# EAGLE board source_eagle (EAGLE 9.6.2)
REV: B
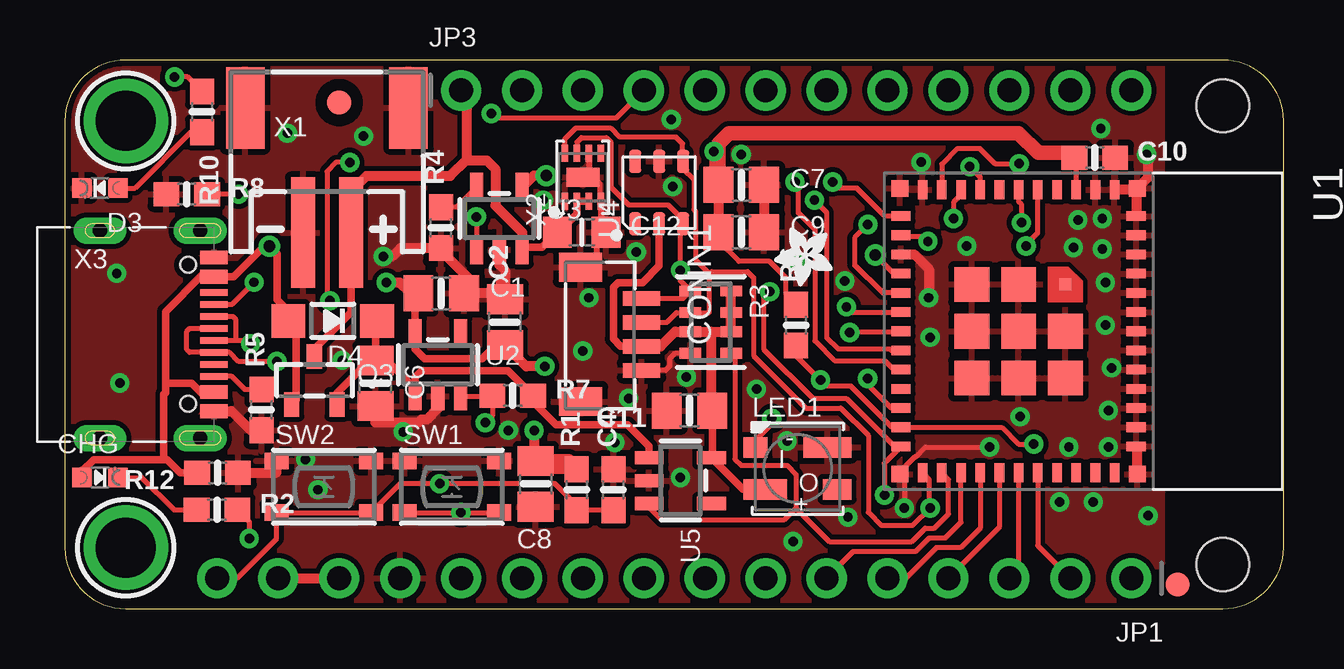
[diagram p0: board, top side]
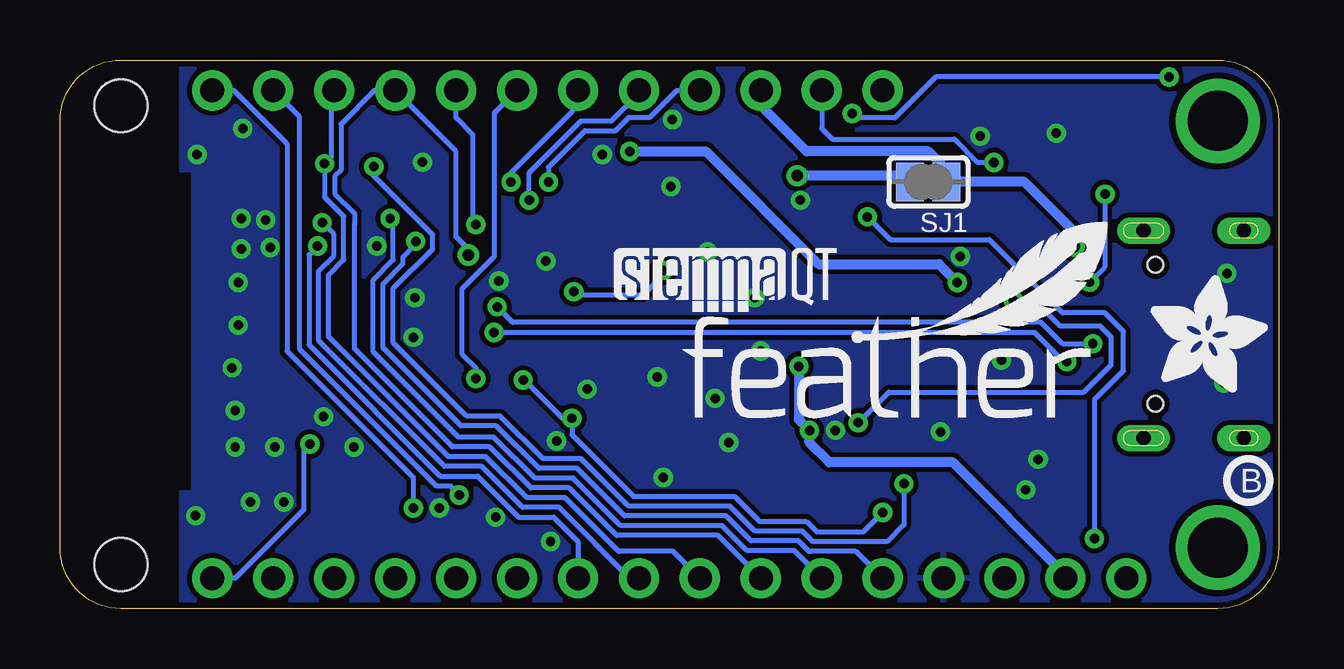
[diagram p1: board, bottom side, seen from below]

Size 50.8 x 22.86 mm. Coordinates in mm from the lower left corner, seen from the top.
Outline: 2.54,0 48.26,0 arc90 50.8,2.54 50.8,20.32 arc90 48.26,22.86 2.54,22.86 arc90 0,20.32 0,2.54 arc90 2.54,0
Copper layers (1*16): Top 0.035mm / dielectric 1.5mm / Bottom 0.035mm
Design rules "adafruit 7-7 *": minimum track width 6mil, minimum drill 15.5mil, track to track 8mil, track to pad 7mil, pad to pad 7mil, via to via 7mil, smd to smd 7mil, copper to edge 10mil, drill to drill 8mil, minimum pad ring 10mil, minimum via ring 8mil, stop-mask expansion 2mil, vias tented up to drill 20mil, thermal gap 10mil
Net classes: 2 gnd: width 0.254 mm, drill 0.483 mm; 3 Power: width 0.305 mm, drill 0.483 mm
Holes 2.2 mm at 48.26,1.84 48.26,20.95

## Footprints (pad centres in the part's own frame; a part is rotated, then mirrored left to right if it is on the bottom)
0805-NO = smd 1.24 x 1.5: 1 -0.95,0; 2 0.95,0
0603-NO = smd 1.075 x 1: 1 -0.85,0; 2 0.85,0
_0805MP = smd 1.2 x 1.3: 1 -1.016,0; 2 1.016,0
CHIPLED_0603_NOOUTLINE = smd 0.8 x 0.8: A 0,-0.75; C 0,0.75
JST_SH4_RA = smd 0.6 x 1.55: 1 1.5,0.924; 2 0.5,0.924; 3 -0.5,0.924; 4 -1.5,0.924 | smd 1.2 x 1.8: MT1 -2.8,-1.624; MT2 2.8,-1.624
SOD-123 = smd 1.4 x 1.4: A 1.85,0; C -1.85,0
1X16_ROUND = drill 1 pad 1.676: 1 -19.05,0; 2 -16.51,0; 3 -13.97,0; 4 -11.43,0; 5 -8.89,0; 6 -6.35,0; 7 -3.81,0; 8 -1.27,0; 9 1.27,0; 10 3.81,0; 11 6.35,0; 12 8.89,0; 13 11.43,0; 14 13.97,0; 15 16.51,0; 16 19.05,0
1X12_ROUND = drill 1 pad 1.676: 1 -13.97,0; 2 -11.43,0; 3 -8.89,0; 4 -6.35,0; 5 -3.81,0; 6 -1.27,0; 7 1.27,0; 8 3.81,0; 9 6.35,0; 10 8.89,0; 11 11.43,0; 12 13.97,0
LED3535_FULLPADS = smd 1 x 0.85: 1 -1.75,0.875 | smd 1.8 x 0.85: 2 -1.35,-0.875 | smd 1.2 x 0.85: 3 1.65,-0.875 | smd 2 x 0.85: 4 1.25,0.875
SOT23-R = smd 0.635 x 1.016: 1 -0.95,-1; 2 0.95,-1; 3 0,1
RESPACK_4X0603 = smd 0.45 x 0.9: 1 -1.3,-0.85; 2 -0.4,-0.85; 3 0.4,-0.85; 4 1.3,-0.85; 5 1.3,0.85; 6 0.4,0.85; 7 -0.4,0.85; 8 -1.3,0.85
SOLDERJUMPER_CLOSEDWIRE = smd 1.168 x 1.6: 1 -0.762,0; 2 0.762,0 | smd 0.635 x 0.203: WIRE 0,0
BTN_RKB2_4.6X2.8 = smd 1 x 0.7: A 1.973,1.075; A' -1.973,1.075; B 1.973,-1.075; B' -1.973,-1.075
ESP32-PICO-MINI = smd 0.8 x 0.4: 1 -5.9,4; 2 -5.9,3.2; 3 -5.9,2.4; 4 -5.9,1.6; 5 -5.9,0.8; 6 -5.9,0; 7 -5.9,-0.8; 8 -5.9,-1.6; 9 -5.9,-2.4; 10 -5.9,-3.2; 11 -5.9,-4; 25 5.9,-4; 26 5.9,-3.2; 27 5.9,-2.4; 28 5.9,-1.6; 29 5.9,-0.8; 30 5.9,0; 31 5.9,0.8; 32 5.9,1.6; 33 5.9,2.4; 34 5.9,3.2; 35 5.9,4 | smd 0.4 x 0.8: 12 -4.8,-4.9; 13 -4,-4.9; 14 -3.2,-4.9; 15 -2.4,-4.9; 16 -1.6,-4.9; 17 -0.8,-4.9; 18 0,-4.9; 19 0.8,-4.9; 20 1.6,-4.9; 21 2.4,-4.9; 22 3.2,-4.9; 23 4,-4.9; 24 4.8,-4.9; 36 4.8,4.9; 37 4,4.9; 38 3.2,4.9; 39 2.4,4.9; 40 1.6,4.9; 41 0.8,4.9; 42 0,4.9; 43 -0.8,4.9; 44 -1.6,4.9; 45 -2.4,4.9; 46 -3.2,4.9; 47 -4,4.9; 48 -4.8,4.9 | smd 1.45 x 1.45: 49 0,0; 54 -1.95,0; 55 -1.95,-1.95; 56 0,-1.95; 57 1.95,-1.95; 58 1.95,0; 59 1.95,1.95; 60 0,1.95 | smd 0.7 x 0.7: 50 5.95,4.95; 51 5.95,-4.95; 52 -5.95,-4.95; 53 -5.95,4.95 | smd 0.5 x 0.5: 61 -1.95,1.95
SOT23-5 = smd 0.55 x 1.2: 1 -0.95,-1.3; 2 0,-1.3; 3 0.95,-1.3; 4 0.95,1.3; 5 -0.95,1.3
LONGAN-IC_SNR6-1.0-3X3X1MM = smd 0.95 x 0.5: 1 1.3,-1; 2 1.3,0; 3 1.3,1; 4 -1.3,1; 5 -1.3,0; 6 -1.3,-1
MOUNTINGHOLE_2.5_PLATED = drill 2.5 pad 3.2: P$1 0,0
FIDUCIAL_1MM = smd 1 x 1: 1 0,0
JSTPH2_BATT = smd 1 x 4.6: 1 -1,-2.049; 2 1,-2.049 | smd 1.6 x 3.4: NC1 -3.4,3.151; NC2 3.4,3.151
TDFN8_2X2MM = smd 0.7 x 0.275: 1 -1,0.75; 2 -1,0.25; 3 -1,-0.25; 4 -1,-0.75; 5 1,-0.75; 6 1,-0.25; 7 1,0.25; 8 1,0.75 | smd 0.8 x 1.38: THERMAL 0,0
USB_C_CUSB31-CFM2AX-01-X = smd 0.575 x 1.15: A1B12 -3.2,2.275; A4B9 -2.4,2.275; B1A12 3.2,2.275; B4A9 2.4,2.275 | smd 0.275 x 1.15: A5 -1.25,2.275; A6 -0.25,2.275; A7 0.25,2.275; A8 1.25,2.275; B5 1.75,2.275; B6 0.75,2.275; B7 -0.75,2.275; B8 -1.75,2.275 | drill 0.6 pad 1 long: M1 -4.32,1.7; M2 4.32,1.7; M3 -4.32,-2.48; M4 4.32,-2.48 | hole 0.65: 2.89,1.2; -2.89,1.2

## Placement (x,y rotation side)
C1  10uF  [0805-NO]  15.68,13.13 0 top
C2  10uF  [0805-NO]  18.34,11.94 90 top
C4  1uF  [0603-NO]  22.86,4.95 90 top
C6  10uF  [0805-NO]  12.94,9.39 270 top
C7  10uF  [0805-NO]  28.19,17.65 0 top
C8  10uF  [0805-NO]  19.62,5.2 270 top
C9  10uF  [0805-NO]  28.19,15.68 0 top
C10  1uF  [0603-NO]  42.93,18.8 0 top
C11  10uF  [0805-NO]  26.04,8.26 180 top
C12  10uF  [_0805MP]  21.54,15.68 0 top
CHG  ORANGE  [CHIPLED_0603_NOOUTLINE]  1.46,5.46 270 top
CONN1  JST SH  [JST_SH4_RA]  23.11,11.43 270 top
D3  RED  [CHIPLED_0603_NOOUTLINE]  1.46,17.53 90 top
D4  MBR540  [SOD-123]  11.16,11.99 180 top
JP1  [1X16_ROUND]  25.4,1.27 180 top
JP3  [1X12_ROUND]  30.48,21.59 0 top
LED1  WS2812B_3535FULL  [LED3535_FULLPADS]  30.54,5.84 0 top
PLABEL0  [PLABEL0]  21.46,20.13 0 top
PLABEL1  [PLABEL1]  6.35,2.92 0 top
PLABEL2  [PLABEL2]  10.22,2.79 0 top
PLABEL4  [PLABEL4]  19.18,2.79 0 top
PLABEL5  [PLABEL5]  16.76,2.79 0 top
PLABEL6  [PLABEL6]  31.75,2.92 0 top
PLABEL7  [PLABEL7]  34.61,2.92 0 top
PLABEL8  [PLABEL8]  36.96,2.92 0 top
PLABEL9  [PLABEL9]  39.37,2.92 0 top
PLABEL10  [PLABEL10]  41.85,2.92 0 top
PLABEL11  [PLABEL11]  16.64,19.94 0 top
PLABEL12  [PLABEL12]  13.78,2.79 0 top
PLABEL13  [PLABEL13]  19.11,19.62 90 top
PLABEL14  [PLABEL14]  44.64,2.92 0 top
PLABEL15  [PLABEL15]  21.69,2.87 0 top
PLABEL16  [PLABEL16]  29.21,2.92 0 top
PLABEL17  [PLABEL17]  45.09,20 0 top
PLABEL18  [PLABEL18]  24.23,2.96 0 top
PLABEL19  [PLABEL19]  26.8,2.92 0 top
PLABEL20  [PLABEL20]  11.11,7.37 0 top
PLABEL21  [PLABEL21]  15.88,7.37 0 top
PLABEL22  [PLABEL22]  26.67,20 0 top
PLABEL23  [PLABEL23]  41.91,20 0 top
PLABEL24  [PLABEL24]  29.65,8.76 0 top
PLABEL25  [PLABEL25]  20.51,9.53 90 top
PLABEL26  [PLABEL26]  3.88,5.63 315 top
PLABEL27  [PLABEL27]  39.37,19.37 90 top
PLABEL28  [PLABEL28]  36.83,19.37 90 top
PLABEL29  [PLABEL29]  34.29,19.3 90 top
PLABEL30  [PLABEL30]  31.75,19.3 90 top
PLABEL31  [PLABEL31]  29.34,20 0 top
PLABEL32  [PLABEL32]  24.13,20 0 top
PLABEL33  [PLABEL33]  32.7,12.45 90 top
PLABEL34  [PLABEL34]  5.33,18.54 0 top
PLABEL35  [PLABEL35]  36.96,4.45 0 top
PLABEL36  [PLABEL36]  25.15,15.56 90 top
PLABEL37  [PLABEL37]  8.13,19.88 0 bottom
PLABEL38  [PLABEL38]  50.23,5.71 0 bottom
PLABEL39  [PLABEL39]  6.35,3.62 90 bottom
PLABEL40  [PLABEL40]  11.43,3.3 90 bottom
PLABEL41  [PLABEL41]  8.89,3.3 90 bottom
PLABEL42  [PLABEL42]  19.18,3.3 90 bottom
PLABEL43  [PLABEL43]  16.51,3.3 90 bottom
PLABEL44  [PLABEL44]  31.75,3.68 90 bottom
PLABEL45  [PLABEL45]  34.29,3.68 90 bottom
PLABEL46  [PLABEL46]  36.89,3.37 90 bottom
PLABEL47  [PLABEL47]  39.24,3.3 90 bottom
PLABEL48  [PLABEL48]  41.91,3.24 90 bottom
PLABEL49  [PLABEL49]  13.97,3.68 90 bottom
PLABEL51  [PLABEL51]  21.64,4.86 90 bottom
PLABEL52  [PLABEL52]  29.21,3.3 90 bottom
PLABEL53  [PLABEL53]  24.22,4.86 90 bottom
PLABEL54  [PLABEL54]  26.8,3.3 90 bottom
PLABEL55  [PLABEL55]  21.59,19.05 90 bottom
PLABEL56  [PLABEL56]  24.07,18.8 90 bottom
PLABEL57  [PLABEL57]  16.45,19.88 0 bottom
PLABEL58  [PLABEL58]  19.05,19.49 90 bottom
PLABEL59  [PLABEL59]  26.67,18.73 90 bottom
PLABEL60  [PLABEL60]  29.15,19.24 90 bottom
PLABEL61  [PLABEL61]  31.75,19.3 90 bottom
PLABEL62  [PLABEL62]  33.91,19.3 90 bottom
PLABEL63  [PLABEL63]  36.58,19.05 0 bottom
PLABEL64  [PLABEL64]  39.56,19.05 0 bottom
PLABEL65  [PLABEL65]  42.42,19.18 90 bottom
PLABEL66  [PLABEL66]  44.96,19.05 90 bottom
PLABEL67  [PLABEL67]  14.29,15.11 0 bottom
PLABEL68  [PLABEL68]  43.56,3.75 0 bottom
Q3  DMG3415U  [SOT23-R]  10.4,9.51 0 top
R1  5.1K  [0603-NO]  21.34,4.95 90 top
R2  5.1K  [0603-NO]  6.34,4.11 0 top
R3  10K  [RESPACK_4X0603]  26.92,11.94 270 top
R4  5.1K  [0603-NO]  15.67,15.88 90 top
R5  5.1K  [0603-NO]  8.19,8.28 90 top
R6  100K  [0603-NO]  30.48,11.81 90 top
R7  100K  [0603-NO]  18.67,8.88 0 top
R8  5.1K  [0603-NO]  5.08,17.27 0 top
R10  5.1K  [0603-NO]  5.71,20.7 270 top
R12  100K  [0603-NO]  6.36,5.66 180 top
SJ1  [SOLDERJUMPER_CLOSEDWIRE]  14.61,17.78 180 bottom
SW1  KMR2  [BTN_RKB2_4.6X2.8]  16.13,5.08 0 top
SW2  KMR2  [BTN_RKB2_4.6X2.8]  10.79,5.08 0 top
U1  ESP32-C6-MINI_MINI  [ESP32-PICO-MINI]  39.75,11.56 270 top
U2  AP2112/RT9080-3.3  [SOT23-5]  15.54,10.16 0 top
U3  MCP73831T-2ACI/OT  [SOT23-5]  18.11,16.26 0 top
U4  AHT20-F  [LONGAN-IC_SNR6-1.0-3X3X1MM]  24.77,17.34 270 top
U5  AP2112/RT9080-3.3  [SOT23-5]  25.65,5.33 270 top
U$14  [PCBFEAT-REV-040]  1.27,5.33 0 bottom
U$15  [FEATHERLOGO_MED]  24.96,7.87 0 bottom
U$26  [ADAFRUIT_2.5MM]  32,15.88 180 top
U$31  MOUNTINGHOLE2.5  [MOUNTINGHOLE_2.5_PLATED]  2.54,20.32 270 top
U$32  MOUNTINGHOLE2.5  [MOUNTINGHOLE_2.5_PLATED]  2.54,2.54 270 top
U$34  FIDUCIAL_1MM  [FIDUCIAL_1MM]  11.43,21.08 270 top
U$35  FIDUCIAL_1MM  [FIDUCIAL_1MM]  46.38,1 270 top
U$48  [ADAFRUIT_5MM]  5.33,9.02 0 bottom
U$53  [STEMMAQT]  27.69,12.38 0 bottom
X1  JSTPH  [JSTPH2_BATT]  10.92,17.72 0 top
X2  MAX17048/T  [TDFN8_2X2MM]  21.59,17.97 90 top
X3  USB C  [USB_C_CUSB31-CFM2AX-01-X]  3.94,11.43 270 top

## Library data of the parts
C1 C2 C4 C6 C7 C9-C12 D4 JP1 JP3 LED1 R1-R8 R10 R12 SJ1 U$26 U$48 = microbuilder
C8 = microbuilder; COMPANY: ADAFRUIT INDUSTRIES; DRAWN: KTOWN; REV: B
CHG D3 Q3 = microbuilder; ROT: 270
CONN1 = adafruit_electromech; LCSC: C145961
PLABEL0 PLABEL1 PLABEL2 PLABEL4-PLABEL49 PLABEL51-PLABEL68 = pinguin
SW1 SW2 = adafruit_electromech
U1 = adafruit_wireless
U2 U5 = adafruit_power; JLC_ROTATION: 0
U3 = microbuilder; JLC_ROTATION: 0; LCSC: C424093
U4 = adafruit_sensor; LCSC_PART: C2757850
U$14 = microbuilder; REV: B
U$15 = feather_silks
U$31 U$32 = adafruit_electromech; BOM: EXCLUDE
U$34 U$35 = microbuilder; BOM: EXCLUDE
U$53 = silks
X1 = adafruit_electromech; LCSC: C47647; ROT: 180
X2 = adafruit_sensor; ROT: 270
X3 = adafruit_electromech; LCSC: C165948

## Nets
3.3V: C1.1 C2.1 C7.1 C8.1 C9.1 C10.1 JP1.14 JP1.15 R1.2 R6.2 U1.3 U2.5
A0: JP1.12 U1.13
A1: JP1.11 U1.9
A2/IO6: JP1.10 JP3.9 U1.15
A3/IO5: JP1.9 JP3.10 U1.10
A4: JP1.8 U1.6
A5: JP1.7 U1.5
D+: U1.18 X3.A6 X3.B6
D-: U1.17 X3.A7 X3.B7
EN: JP3.2 R7.1 U2.3
GND: C1.2 C2.2 C4.2 C6.2 C7.2 C8.2 C9.2 C10.2 C11.2 C12.2 CONN1.1 CONN1.MT1 CONN1.MT2 D3.C JP1.13 LED1.4 R3.4 R4.1 R5.1 R8.1 R12.1 SW1.A SW1.A' SW2.A SW2.A' U1.1 U1.2 U1.11 U1.14 U1.36 U1.37 U1.38 U1.39 U1.40 U1.41 U1.42 U1.43 U1.44 U1.45 U1.46 U1.47 U1.48 U1.49 U1.50 U1.51 U1.52 U1.53 U1.54 U1.55 U1.56 U1.57 U1.58 U1.59 U1.60 U1.61 U2.2 U3.2 U4.5 U5.2 X1.1 X1.NC1 X1.NC2 X2.1 X2.4 X2.6 X2.THERMAL X3.A1B12 X3.B1A12
I2C_PWR: R3.5 U1.26 U5.3
IO0: JP3.6 U1.12
IO7: JP3.8 U1.16
IO8: JP3.7 U1.22
IO9/BOOT/NEOPIX: JP1.1 LED1.1 R6.1 SW1.B SW1.B' U1.23
IO14: JP3.5 U1.19
IO15: JP3.4 R10.1 U1.20
MISO: JP1.4 U1.29
MOSI: JP1.5 U1.28
N$1: CHG.C R2.1
N$2 [Power]: SJ1.2 U3.4
N$3: R2.2 U3.1
N$4: R4.2 U3.5
N$5: D3.A R10.2
N$8: R8.2 X3.A5
N$9: R5.2 X3.B5
RESET: C4.1 JP1.16 R1.1 SW2.B SW2.B' U1.8
RX: JP1.3 U1.30
SCK: JP1.6 U1.27
SCL: CONN1.4 JP3.11 R3.1 U1.24 U4.3 X2.7
SDA: CONN1.3 JP3.12 R3.2 U1.25 U4.4 X2.8
TX: JP1.2 U1.31
VBAT [Power]: C12.1 JP3.1 Q3.3 U3.3 X1.2 X2.2 X2.3
VBUS [Power]: CHG.A D4.A JP3.3 Q3.1 R12.2 SJ1.1 X3.A4B9 X3.B4A9
VHI [Power]: C6.1 D4.C Q3.2 R7.2 U2.1 U5.1
VSENSOR [Power]: C11.1 CONN1.2 LED1.2 R3.3 R3.6 R3.7 R3.8 U4.2 U5.5

## Tracks (layer width: path | path; a pad name or v marks a point on that pad's centre or on a via)
3.3V  (via drill 0.39, 0.4)
  Top 0.203: U1.3 42.15,18.72 C10.1 | R6.2 30.06,13.08 30.06,13.78 29.38,14.46 28.09,14.46 27.24,15.31 C9.1
  Top 0.305: C1.1 14.6,12.99 U2.5 14.6,10.8 14.99,10.41 17.4,10.41 17.97,10.99 C2.1
  Top 0.406: C1.1 14.67,13.2 14.36,13.2 13.97,13.59 v13.4,13.59 | v20,10.1 19.23,10.1 C2.1 | JP1.15 JP1.14 | v27.05,19.05 27.05,18.29 27.24,18.1 C7.1 C9.1 | R1.2 19.94,5.8 19.56,6.18 v19.56,7.43
  Top 0.61: C10.1 41.89,18.99 40.58,18.99 39.75,19.81 27.69,19.81 27.24,19.37 C7.1 | C8.1 20.99,6.15 R1.2
  Bottom 0.406: v13.4,13.59 14.16,14.35 19.18,14.35 23.88,19.05 v27.05,19.05 | v20,10.1 20,7.87 v19.56,7.43 19.56,6.92 18.73,6.1 13.59,6.1 8.89,1.4 JP1.15
A0  (via drill 0.39)
  Top 0.203: U1.13 34.91,15.49 35.78,15.49 v35.97,15.3
  Bottom 0.203: JP1.12 17.63,2.39 19.51,2.39 19.52,2.38 19.59,2.38 20.02,2.82 21.99,2.82 23.03,3.86 27.26,3.86 29.24,5.84 30.84,5.84 32.61,7.62 34.08,7.62 37.34,10.88 37.34,13.52 36.5,14.36 36.5,14.65 35.97,15.18 v35.97,15.3
A1  (via drill 0.39)
  Top 0.203: v37.04,16.26 37.06,16.26 37.06,16.95 37.35,17.24 U1.9
  Bottom 0.203: JP1.11 20.19,2.41 22.16,2.41 23.2,3.45 27.43,3.45 29.41,5.44 31,5.44 32.72,7.15 34.19,7.15 37.74,10.71 37.74,13.69 36.91,14.53 36.91,16.12 v37.04,16.26
A2/IO6  (via drill 0.48)
  Top 0.203: U1.15 34.56,13.96 v33.78,14.73
  Bottom 0.203: JP1.10 23.37,3.05 27.6,3.05 29.58,5.03 31.17,5.03 32.89,6.74 34.44,6.74 38.52,10.83 38.52,16 38.52,16.48 39.34,17.29 39.34,18.01 39.09,18.26 39.09,20.19 37.69,21.59 JP3.9 34.29,19.05 34.29,15.49 33.78,14.99 v33.78,14.73
A3/IO5  (via drill 0.39)
  Top 0.203: v39.77,18.54 38.75,18.54 38.12,19.18 37.21,19.18 36.55,18.52 U1.10
  Bottom 0.203: JP3.10 39.5,21.46 39.5,18.82 v39.77,18.54 39.77,17.14 38.98,16.35 38.98,14.54 39.61,13.9 39.61,11.34 34.61,6.34 33.06,6.34 31.34,4.62 29.75,4.62 27.51,2.39 25.25,2.39 JP1.9
A4  (via drill 0.39)
  Top 0.203: U1.6 39.75,16.96 39.87,16.84 v39.87,16.08
  Bottom 0.203: JP1.8 27.05,1.27 30,4.22 31.51,4.22 33.22,5.93 34.78,5.93 40.02,11.17 40.02,14.07 39.38,14.71 39.38,15.59 v39.87,16.08
A5  (via drill 0.39)
  Top 0.203: v40.06,15.11 40.06,15.17 40.55,15.66 U1.5
  Bottom 0.203: v40.06,15.11 40.42,14.75 40.42,11 34.95,5.52 33.39,5.52 31.68,3.81 30.23,3.81 29.21,2.79 JP1.7
D+  (via drill 0.39)
  Top 0.203: v8.84,10.3 7.25,10.3 6.87,10.68 X3.B6 5.2,10.68 5.08,10.79 5.08,11.56 5.2,11.67 5.2,11.68 X3.A6 | U1.18 34.81,11.51 32.84,11.51 32.84,11.5 v32.71,11.5
  Bottom 0.203: v8.84,10.3 8.96,10.3 10.17,11.5 v32.71,11.5
D-  (via drill 0.39)
  Top 0.203: X3.A7 7.11,11.18 | 7.11,11.18 7.61,11.18 v7.75,11.04 | X3.B7 7,12.18 7.11,12.06 7.11,11.18 | v32.58,12.57 32.58,12.36 U1.17
  Bottom 0.203: v7.75,11.04 9.02,11.04 9.91,11.93 31.93,11.93 v32.58,12.57
EN  (via drill 0.39, 0.4)
  Top 0.203: U2.3 17.8,8.86 R7.1 17.82,8.04 v17.53,7.75 | v11.87,18.59 11.29,18.59 10.92,18.22 10.92,12.95 v11.05,12.83
  Bottom 0.203: v17.53,7.75 16.26,9.02 8.13,9.02 6.99,10.16 6.99,11.31 7.44,11.77 9.1,11.77 10.16,12.83 v11.05,12.83 | JP3.2 19.05,20 18.61,19.56 13.52,19.56 12.57,18.61 11.87,18.61 v11.87,18.59
GND  (via drill 0.39)
  Top 0.203: R3.4 25.43,10.64 25.21,10.41 25.21,10.1 25.04,9.93 CONN1.1 | X2.4 22.3,17.01 22.3,17.71 22.04,17.97 X2.THERMAL | v38.54,6.73 35.88,6.73 35.48,6.34 35.44,6.34 34.8,5.7 U1.51 34.99,5.42 v34.99,4.19 | C2.2 18.59,12.89 18.72,13.02
  Top 0.254: X2.6 21.84,18.22 X2.THERMAL | C12.2 22.52,15.65 | 22.52,15.65 22.16,15.29 22.16,14.67 21.72,14.23 CONN1.MT1 | X2.4 22.35,16.96 22.35,15.81 22.52,15.65
  Top 0.406: X3.B1A12 6.95,8.23 7.75,7.43 R5.1 | C1.2 16.63,13.14 16.89,13.14 | 16.89,13.14 16.89,13.7 15.67,14.92 R4.1 13.99,15.03 13.63,14.67 v13.27,14.67 | U2.2 15.54,8.33 15.09,7.88 14.86,7.88 14.73,7.75 12.94,7.75 C6.2 | U3.2 18.11,14.32 18.34,14.1 C2.2 18.08,13.14 16.89,13.14 | R12.1 8.82,5.66 SW2.A' | 18.72,13.02 18.17,13.56 | v45.09,18.92 45.15,18.86 45.15,17.95 U1.53 44.65,17.46 | 44.65,17.46 U1.1 | 44.65,17.46 U1.48 | U1.50 44.7,6.71 U1.36 | C7.2 C9.2 | U1.14 35.41,14.76 36.01,14.16 v36.01,12.95 | C4.2 23.15,5.8
  other vias: 21.84,12.95 11.56,10.35 10.03,6.22 2.16,13.97 2.29,9.4 9.27,19.81 12.45,19.68 23.81,14.86 28.19,18.92 21.59,10.73 30.54,14.48 14.1,7.37 32.51,13.65 39.81,8 41.85,6.73 43.5,6.73 45.15,3.87 42.86,4.45 41.47,4.45 43.5,8.26 43.62,10.03 43.37,11.81 43.37,13.59 43.24,14.99 43.24,16.26 36.07,11.3 35.69,18.61 42.23,16.19 42.04,15.05 37.59,15.11 18.48,7.43 43.18,20 32.64,3.81 10.54,4.95 30.35,2.79 19.94,17.02 25.27,20.38 22.92,6.92 28.83,9.14 30.1,6.99 25.65,5.46 25.91,9.65 23.5,8.76 25.34,17.59
  pour Top: 0,22.86 45.72,22.86 45.72,0 0,0
  pour Bottom: 0,22.86 45.72,22.86 45.72,0 0,0
I2C_PWR
  Top 0.203: U1.26 36.83,5.38 36.83,3.94 36.25,3.35 35.86,3.35 35.3,2.8 31.87,2.8 30.48,4.19 | 30.48,4.19 30.48,5.59 30.1,5.97 28.19,5.97 27.93,6.23 27.93,10.48 R3.5 | 30.48,4.19 29.97,3.68 24.89,3.68 24.35,4.22 U5.3
IO0  (via drill 0.39)
  Top 0.203: U1.12 34.19,16.36 33.02,17.53 32.26,17.53 v32,17.78
  Bottom 0.203: JP3.6 29.46,21.34 29.46,20.7 32,18.16 v32,17.78
IO7  (via drill 0.39)
  Top 0.203: U1.16 34.09,13.16 32.92,14.33 32.92,15.45 v33.47,16
  Bottom 0.203: v33.47,16 33.6,16.13 33.6,19.75 34.29,20.45 JP3.8
IO8  (via drill 0.39)
  Top 0.203: U1.22 34.44,8.36 33.47,9.34 v33.47,9.59
  Bottom 0.203: v33.47,9.59 33.47,10.03 34.04,10.6 34.04,13.34 32.7,14.67 32.7,20.64 JP3.7
IO9/BOOT/NEOPIX  (via drill 0.39, 0.4)
  Top 0.203: v40.39,6.86 39.75,6.86 39.05,7.56 U1.23 34.48,7.56 32.77,9.27 31.75,9.27 v31.5,9.53 30.48,10.54 R6.1 | LED1.1 28.5,6.72 29.46,7.68 v29.46,7.93 | SW1.B' v16.51,4 SW1.B
  Bottom 0.203: v40.39,6.86 40.64,6.6 40.64,4.12 43.49,1.27 JP1.1 | v31.5,9.53 31.44,9.53 29.84,7.93 v29.46,7.93 29.46,7.24 26.9,4.67 22.7,4.67 21.65,3.63 19.69,3.63 19.26,3.2 17.32,3.2 v16.51,4
IO14  (via drill 0.39)
  Top 0.203: v31.24,17.02 31.75,16.51 31.75,11.3 32.23,10.82 34.38,10.82 34.45,10.76 U1.19
  Bottom 0.203: v31.24,17.02 31.24,18.16 29.08,20.32 27.81,20.32 26.67,21.46 JP3.5
IO15  (via drill 0.39, 0.4)
  Top 0.203: R10.1 5.11,22.15 v4.57,22.15 | U1.20 34.56,9.96 34.17,10.34 32.08,10.34 31.26,11.16 31.26,15.81 30.56,16.51 30.56,17.65 v30.44,17.78 | JP3.4 22.97,20.43 20.46,20.43 20.45,20.45 17.97,20.45 v17.78,20.64
  Bottom 0.203: v4.57,22.15 14.3,22.15 16,20.45 17.59,20.45 v17.78,20.64 | v30.44,17.78 30.44,18.39 28.91,19.91 27.64,19.91 27.09,20.47 26.21,20.47 25.09,21.59 JP3.4
MISO
  Top 0.203: U1.29 38.95,3.39 JP1.4
MOSI
  Top 0.203: U1.28 38.15,3.35 37.34,2.54 36.32,2.54 35.05,1.27 JP1.5
N$1
  Top 0.203: R2.1 4.55,4.12 3.2,5.46 CHG.C
N$2  (via drill 0.48)
  Top 0.406: v20.07,18.04 19.54,18.04 U3.4
  Bottom 0.406: SJ1.2 15.63,18.04 v20.07,18.04
N$3  (via drill 0.39)
  Top 0.203: v17.14,16.32 17.16,16.31 U3.1 | R2.2 7.68,3.62 v7.68,2.92
  Bottom 0.203: v17.14,16.32 16.19,15.37 12.07,15.37 9.02,12.32 7.24,12.32 6.48,11.56 6.48,9.91 7.68,8.7 v7.68,2.92
N$4
  Top 0.203: U3.5 16.33,16.73 R4.2
N$5
  Top 0.203: D3.A 2.92,17.53 5.25,19.85 R10.2
N$8  (via drill 0.39)
  Top 0.203: X3.A5 6.96,12.68 v7.88,13.6 | v7.24,17.27 R8.2
  Bottom 0.203: v7.24,17.27 v7.25,17.26 7.25,14.23 v7.88,13.6
N$9
  Top 0.203: X3.B5 6.96,9.68 7.51,9.13 R5.2
RESET  (via drill 0.39)
  Top 0.203: JP1.16 7.18,1.27 8.82,2.92 SW2.B' SW2.B 13.97,5.21 v15.62,5.21 20.43,5.21 21.34,4.3 R1.1 C4.1 | U1.8 38.15,17.98 v37.72,18.41
  Bottom 0.203: v15.62,5.21 15.62,3.49 16.32,2.79 19.43,2.79 19.86,3.23 21.82,3.23 22.86,4.27 27.09,4.27 29.08,6.25 30.67,6.25 32.45,8.03 33.85,8.03 36.91,11.08 36.91,13.34 35.27,14.98 35.27,15.58 37.85,18.16 37.85,18.29 v37.72,18.41
RX
  Top 0.203: U1.30 39.75,1.65 JP1.3
SCK
  Top 0.203: JP1.6 32.87,2.39 35.47,2.39 36.03,2.95 36.7,2.95 37.35,3.59 U1.27
SCL  (via drill 0.39)
  Top 0.203: CONN1.4 25.77,12.93 R3.1 25.65,13.66 v25.65,14.1 25.65,15.93 U4.3 25.77,16.21 25.15,16.83 23.5,16.83 22.76,17.57 22.76,19.44 22.57,19.62 21.53,19.62 21.34,19.43 X2.7 | U1.24 34.72,6.62 | 34.72,6.62 34.15,6.06 v34.15,4.75 v34.16,4.74 | v29.38,13.21 29.13,12.95 29.13,10.81 31.18,8.76 32.58,8.76 34.72,6.62
  Bottom 0.203: JP3.11 40.83,20.51 40.83,10.83 35.12,5.12 34.54,5.12 v34.16,4.74 | v25.65,14.1 25.65,13.91 26.48,13.08 29.25,13.08 v29.38,13.21
SDA  (via drill 0.39)
  Top 0.203: CONN1.3 25.09,11.93 25.5,12.34 R3.2 26.86,12.34 26.86,13.95 26.87,13.96 | 26.87,13.96 26.89,13.97 26.96,14.04 28.46,14.04 28.7,13.8 28.7,10.54 30.89,8.36 32.35,8.36 33.48,7.22 33.48,4.01 34.04,3.45 35.33,3.45 v36.07,4.19 36.01,4.13 36.01,5.4 U1.25 | X2.8 20.84,19.57 21.3,20.03 22.74,20.03 23.12,19.65 25.48,19.65 25.75,19.38 25.75,18.65 U4.4 25.77,18.32 26.22,17.86 26.22,16.63 26.29,16.55 26.29,14.54 26.87,13.96
  Bottom 0.203: v36.07,4.19 36.07,5.46 41.34,10.73 41.34,19.37 43.56,21.59 JP3.12
TX
  Top 0.203: U1.31 40.55,2.63 JP1.2
VBAT
  Top 0.305: Q3.3 10.4,10.83 11.92,12.35 X1.2 | U3.3 19.06,15.05 19.89,15.05 C12.1 20.71,15.88 20.77,15.88 21.34,16.45 X2.2 X2.3
  Top 0.406: X1.2 11.92,17.38 12.57,18.03 16.07,18.03 16.76,18.73 | U3.3 19.06,15.67 17.94,16.79 17.94,18.31 17.59,18.67 16.76,18.67 16.76,18.73 | JP3.1 16.76,21.34 16.76,18.73
VBUS  (via drill 0.48)
  Top 0.305: X3.B4A9 5.7,9.03 5.7,8.97 5.29,9.39 4.19,9.39 | 4.19,9.39 4.19,9 4.13,8.94 4.13,6.21 | 4.19,9.39 4.19,12.38 5.7,13.89 5.7,13.83 X3.A4B9 7.04,13.83 8.41,15.21 v8.52,15.1 8.84,14.78 8.84,12.88 9.31,12.4 D4.A 9.63,11.67 9.63,8.69 Q3.1 | 0.71,5.71 1.21,6.21 4.13,6.21 | 4.13,6.21 4.26,6.21 4.81,5.66 R12.2
  Top 0.406: CHG.A 0.71,5.71
  Bottom 0.406: v8.52,15.1 8.52,15.7 10.6,17.78 SJ1.1 13.84,18.29 14.61,19.05 19.68,19.05 21.59,20.95 JP3.3
VHI
  Top 0.305: D4.C 12.94,11.92 C6.1 | C6.1 12.69,10.34 11.35,9 Q3.2 | C6.1 13.41,10.34 14.6,9.15 U2.1 14.6,9.64 14.86,9.91 18.48,9.91 19.51,8.88 R7.2 19.52,8.61 20.48,7.65 23.46,7.65 24.35,6.76 U5.1
VSENSOR
  Top 0.305: 27.08,6.38 26.98,6.48 C11.1 | 27.08,6.38 27.08,6.41 U5.5 | 27.08,6.38 27.08,6.16 28.27,4.97 LED1.2 | U4.2 24.77,14.29 24.07,13.59 23.05,13.59 22.86,13.4 22.86,11.24 23.17,10.93 CONN1.2
  Top 0.406: CONN1.2 24.83,10.93 25.44,11.54 R3.3 26.93,11.54 | 26.93,11.54 R3.6 R3.7 R3.8 | 26.93,11.54 26.93,8.31 C11.1

## Text on the board
Pinguin_tBackup: EN | USB | 15 | 12 | IO0 | SCL | SDA | 15 | BAT | IO8 | IO7 | IO6 | IO5 | AHT / 20 | ESP32-C6 | QTI2C | Neo | Reset | Boot | Chg | Feather | RST | 3V | 3V | GND | A0 | A1 | A2 | A3 | A4 | A5 | SCK | MO | MI | RX | TX | IO9
Pinguin_bBackup: 3.7/4.2V / LiPoly Batt / µUSB charge | BAT | EN | USB | IO15 | IO14 | IO0 | IO8 | IO7 | A2 / IO6 | A3 / IO5 | SCL | SDA | Charger / Disable | ESP32-C6 Feather / 160MHz RISC-V / WiFi/BLE/ZigBee / 4M Flash No PSRAM | A2/IO6 | A3/IO5 | RST | GND | SCK | Boot/Neo / IO9 | 3V | 3V | A0 | A1 | A4 | A5 | MO | MI | RX | TX | Debug / TX